# Altium PCB AMC_SFP.PcbDoc
Units mil, origin at the board's own origin, x right, y up, seen from the top; angles counter-clockwise.
Board outline 7110.66 x 2894.12 mil, 4 copper layers (Top Layer, GND, Supply, Bottom Layer), stack 91.824 mil thick; 49 components, 40 nets, 473 pads, 142 vias.
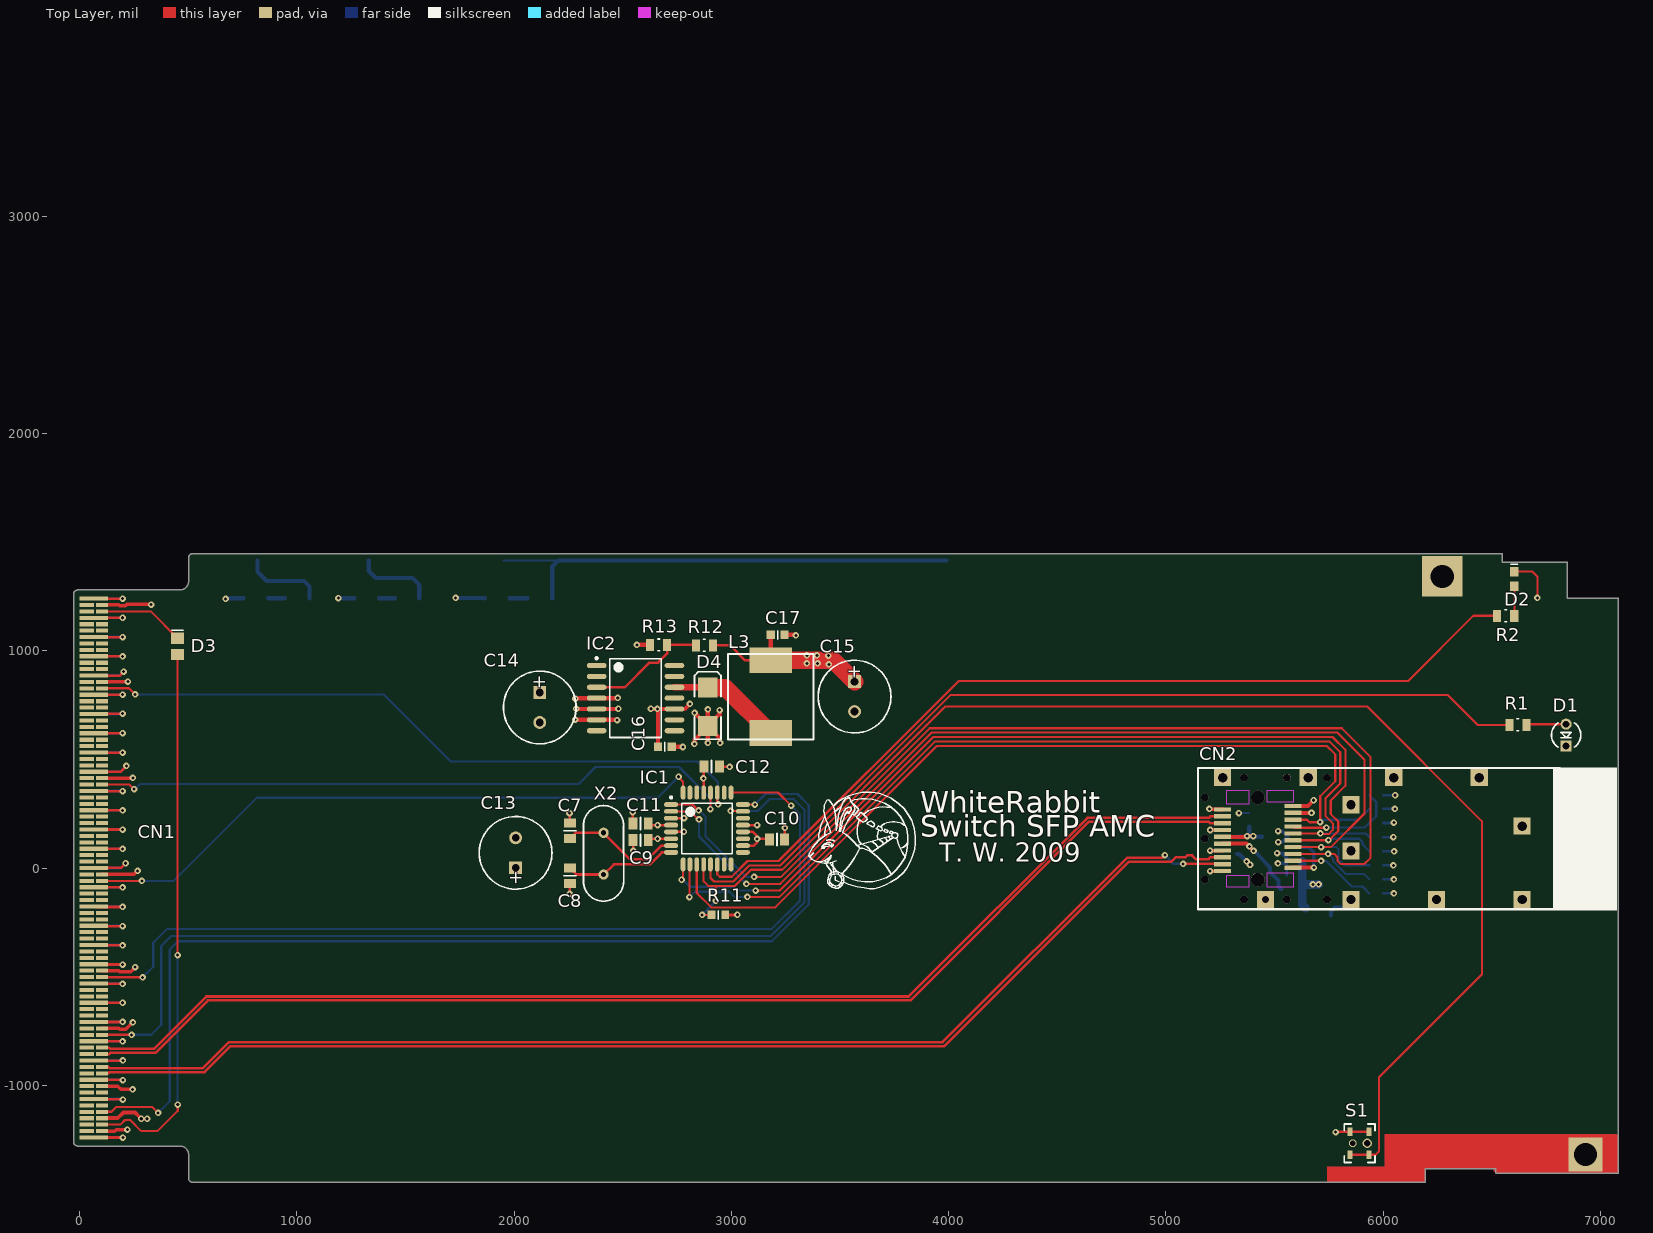
[diagram p0: Top Layer view]
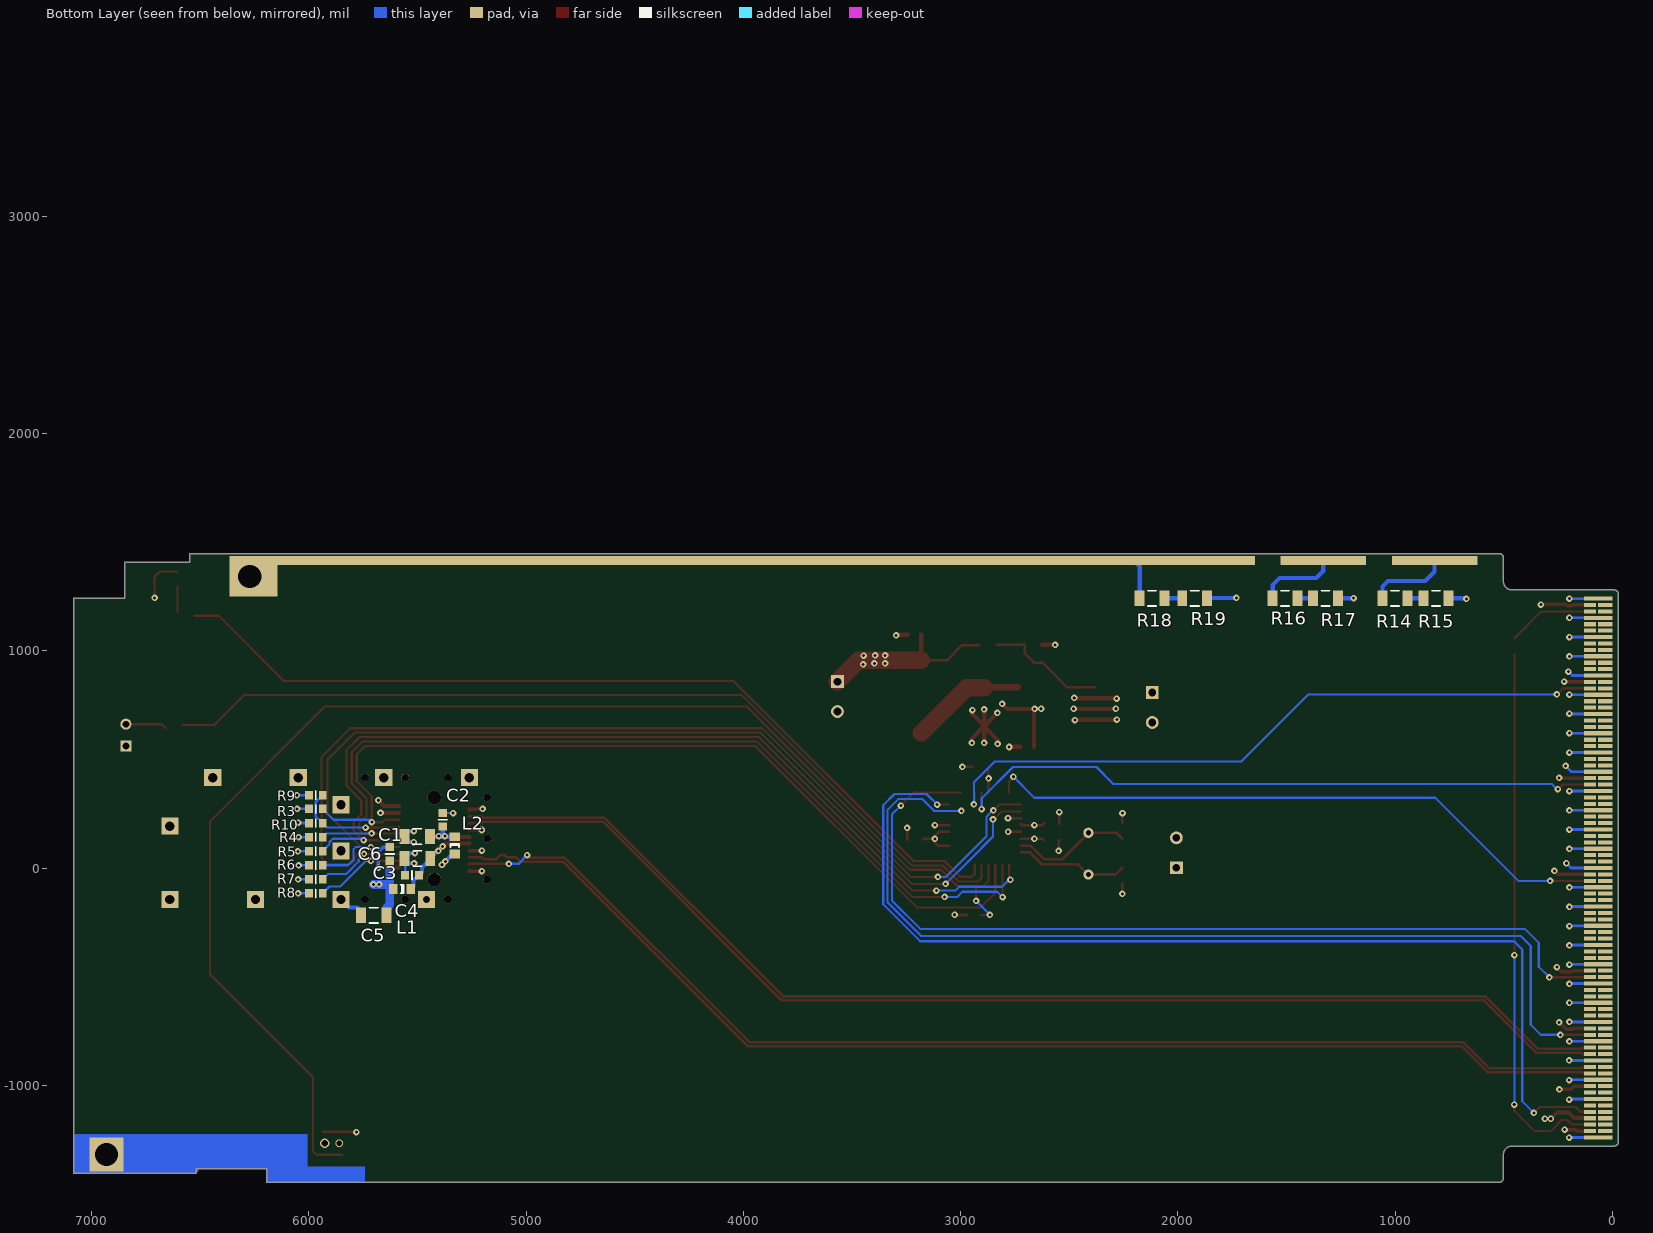
[diagram p1: Bottom Layer view, seen from below]
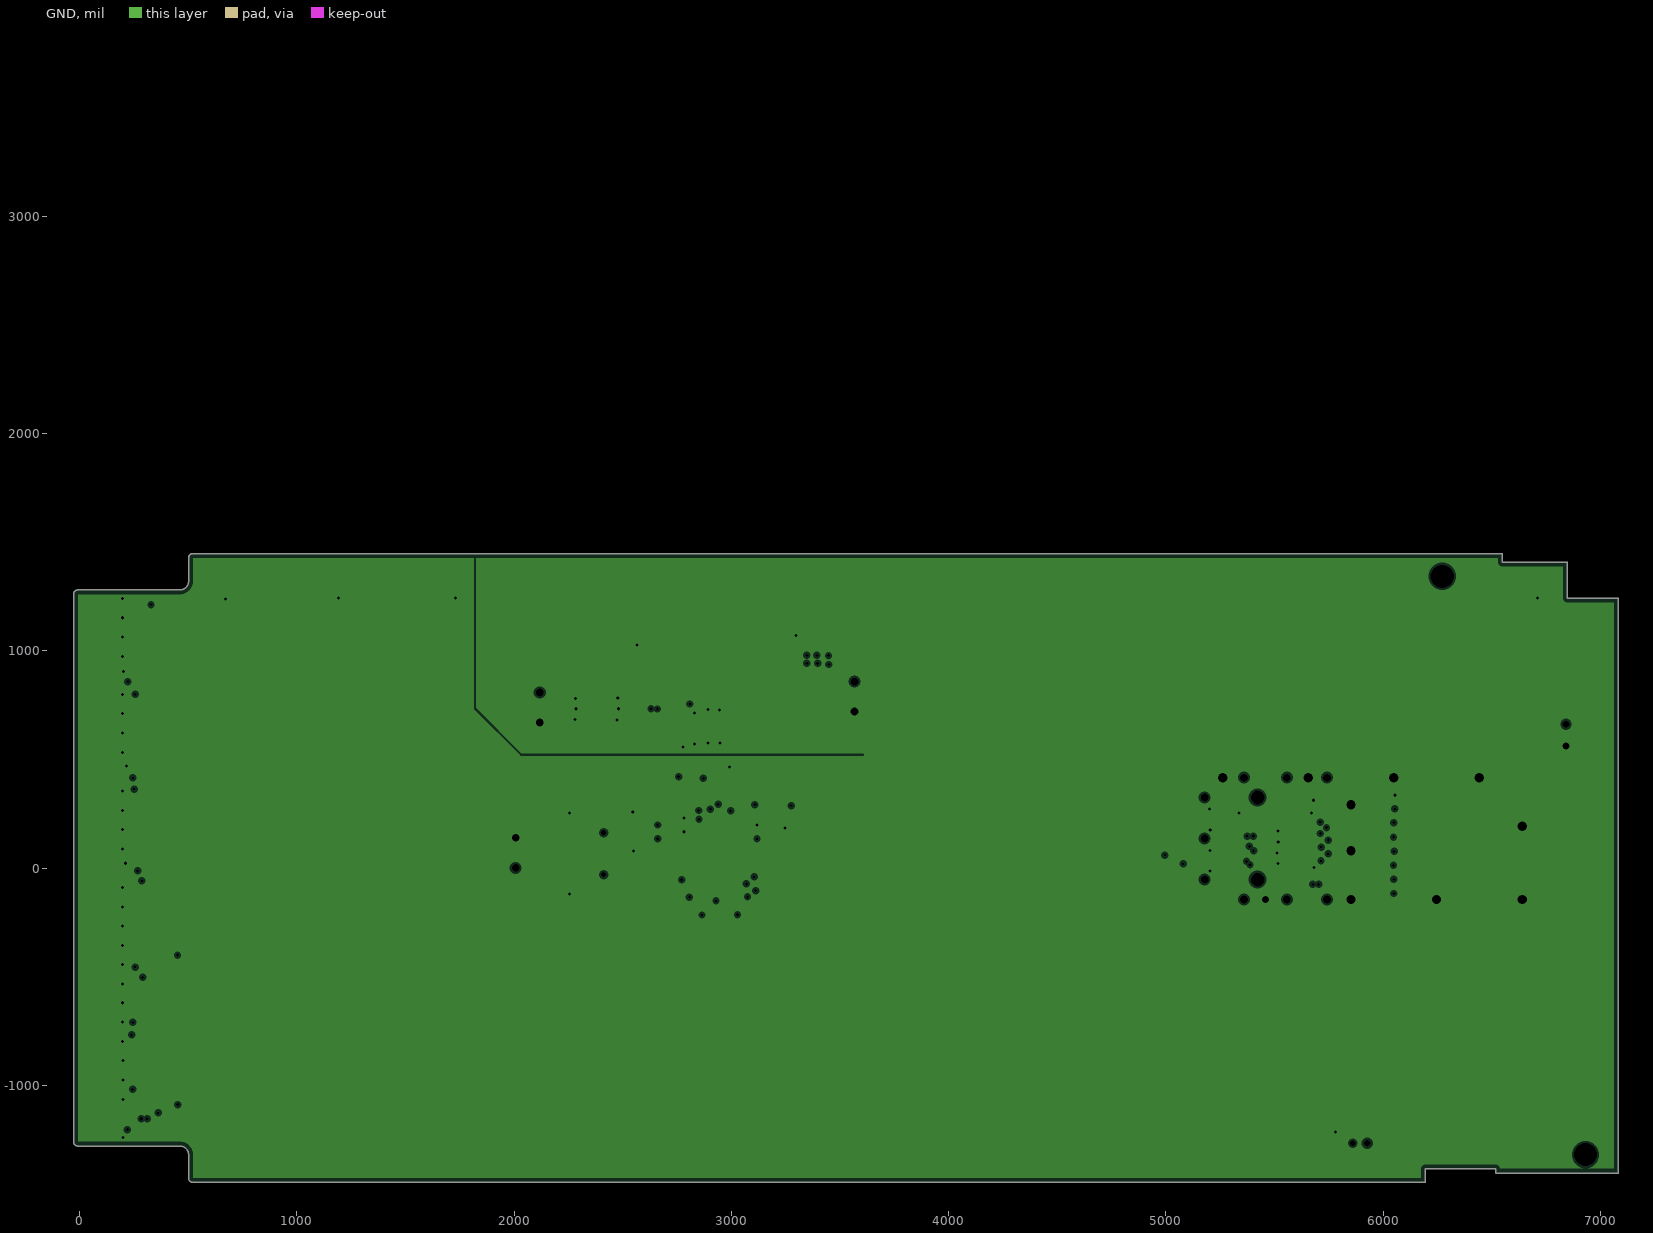
[diagram p2: GND, clearances drawn from the general rule]
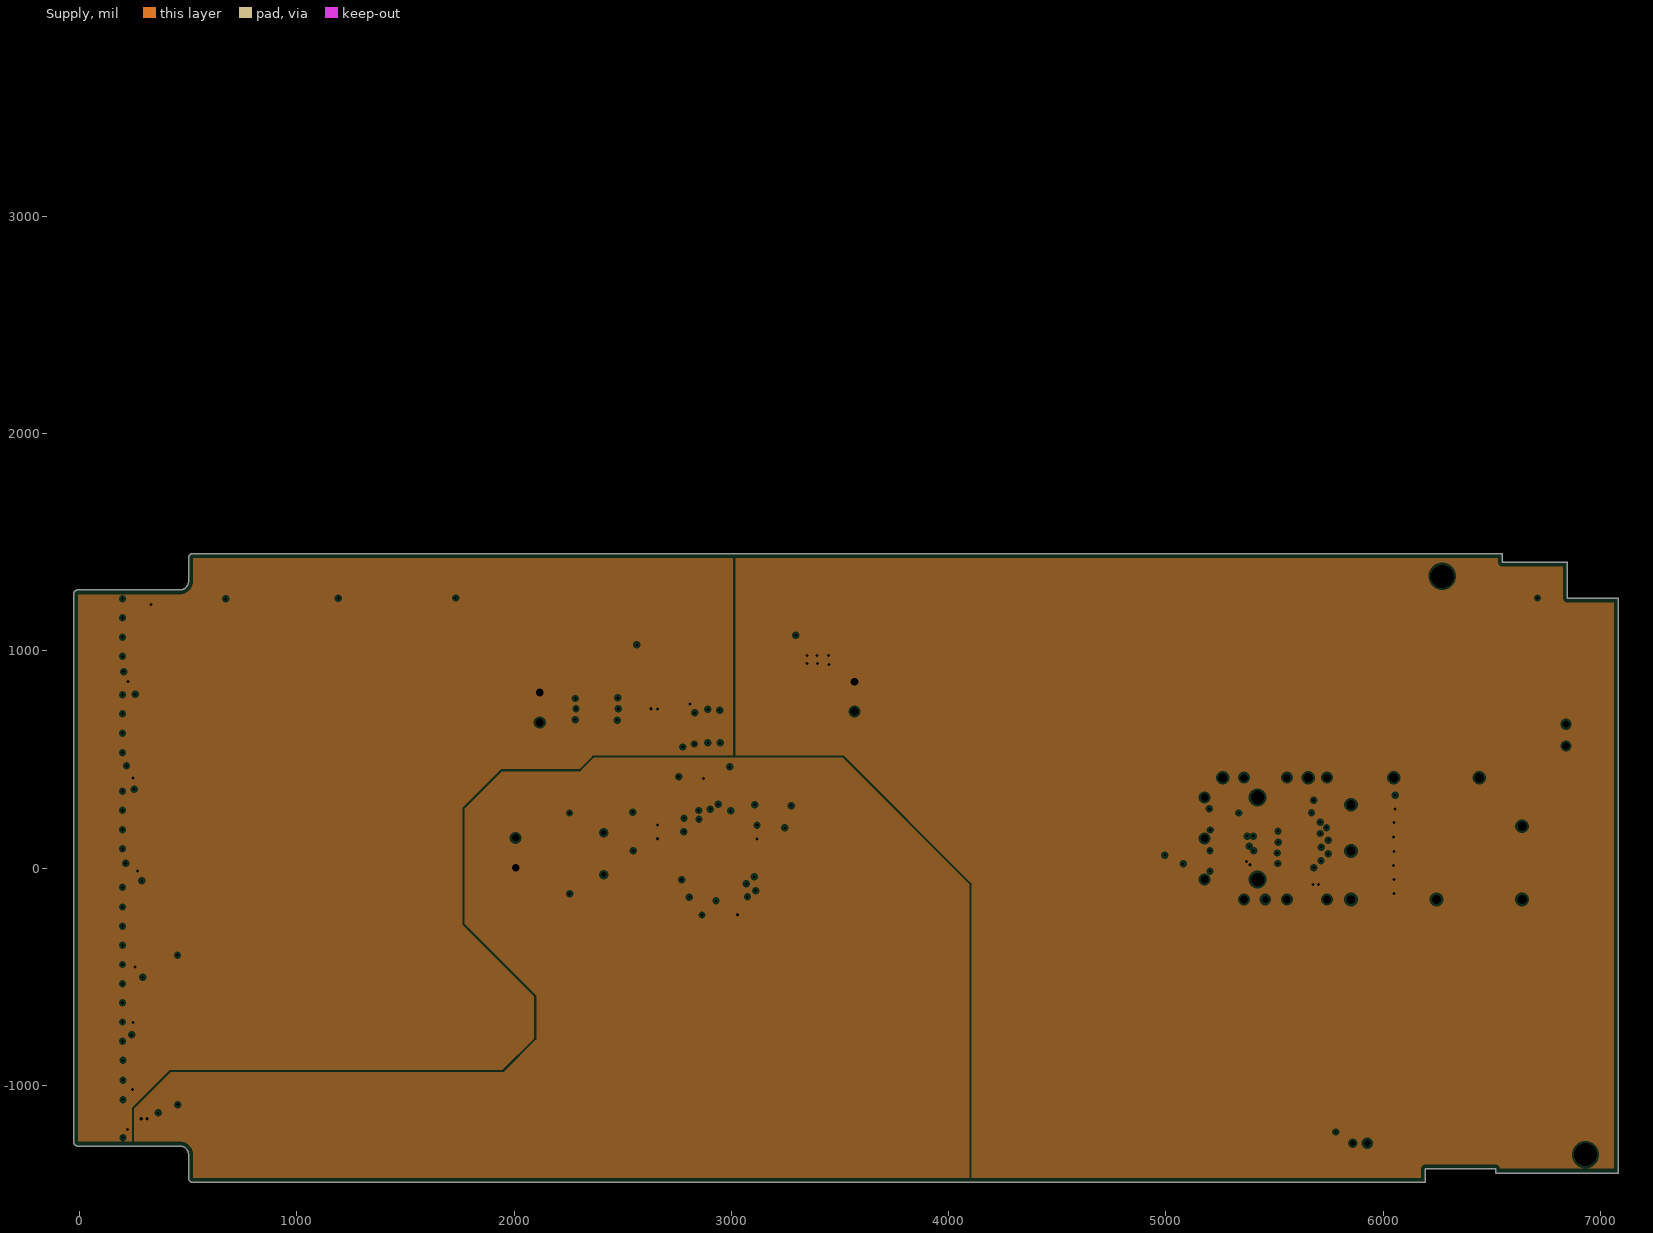
[diagram p3: Supply, clearances drawn from the general rule]
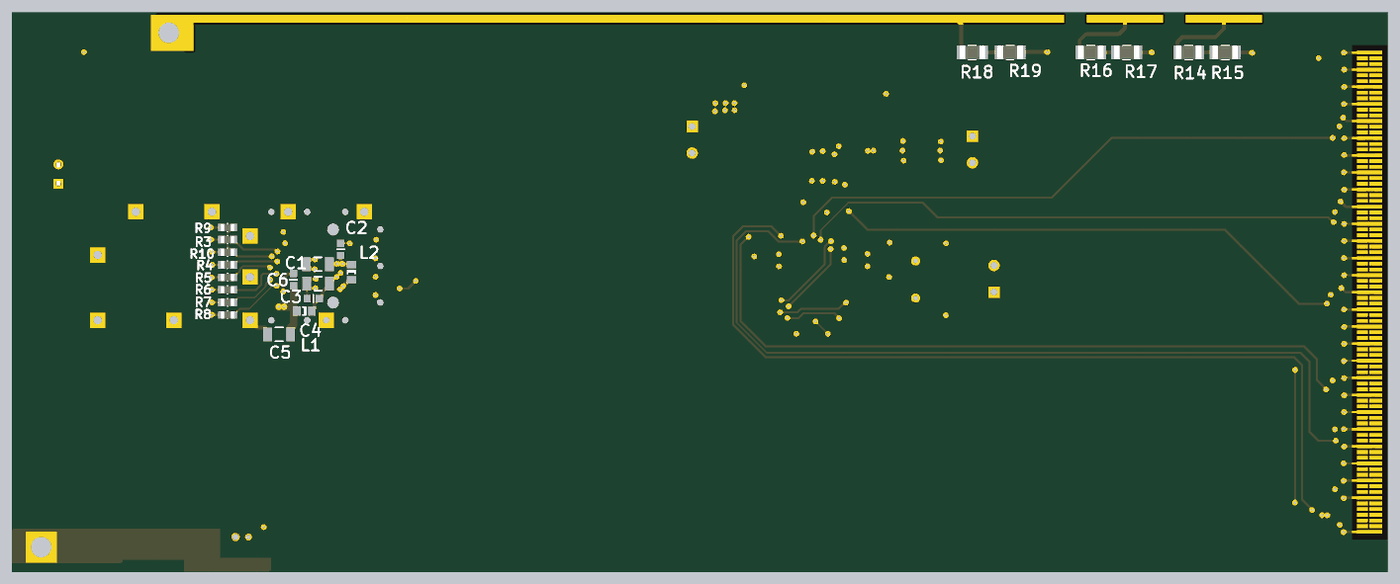
[diagram p4: 3D render of the assembled board from below, using the file's embedded part models]

## Layer stack, top to bottom
Top Layer: signal copper 1.4
Dielectric: core 61.0236, FR-4, Dk 4.8
GND: plane copper 1.4, net GND
Dielectric: prepreg 12.6, FR-4, Dk 4.8
Supply: plane copper 1.4, net (Multiple Nets)
Dielectric: core 12.6, FR-4, Dk 4.8
Bottom Layer: signal copper 1.4

## Board outline
-27.76,-1259.76 -27.76,1259.92 -27.76,1259.93 cw(c-7.86,1259.92) -7.86,1279.82 460.67,1279.82 cw(c460.73,1279.62) 460.74,1279.83 ccw(c461.71,1319.87) 461.32,1279.82 461.98,1279.82 cw(c461.98,1279.61) 462,1279.82 ccw(c461.71,1319.87) 501.77,1319.87 ccw(c461.71,1319.87) 501.77,1319.93 501.77,1427.25 cw(c521.66,1427.25) 521.66,1447.14 6547.25,1447.14 cw(c6547.25,1446.93) 6547.47,1446.93 6547.47,1407.77 6846.47,1407.77 cw(c6846.47,1407.56) 6846.68,1407.56 6846.68,1242.42 7082.69,1242.42 cw(c7082.69,1242.21) 7082.9,1242.21 7082.9,-1403.46 cw(c7082.69,-1403.46) 7082.69,-1403.68 6517.73,-1403.68 cw(c6517.73,-1403.46) 6517.52,-1403.46 6517.52,-1383.99 6193.14,-1383.99 6193.14,-1446.77 cw(c6192.92,-1446.77) 6192.92,-1446.98 519.7,-1446.98 cw(c519.7,-1446.77) 519.51,-1446.86 cw(c521.66,-1427.09) 501.88,-1429.24 cw(c501.98,-1429.05) 501.77,-1429.05 501.77,-1318.82 ccw(c462.61,-1318.82) 462.61,-1279.66 -7.86,-1279.66 -7.87,-1279.66 cw(c-7.86,-1259.76)

## Design rules (kind name [scope] priority, off if disabled: settings)
Clearance Clearance_poly_supply_1v2 [InPolygon and InNet('+1v2')] p1: gap=5
Clearance Clearance_poly_gnd_12v [(InPolygon) and (InNet(GND) or InNet('+12V_BACKPLANE') or InNet('+12V_BULK'))] p2: gap=6
Clearance Clearance_fine_bga [WithinRoom('CPU') or WithinRoom('FPGA') vs WithinRoom('CPU')    or WithinRoom('FPGA')] p3: gap=4
Clearance [All] p4: gap=6
ComponentClearance [All] p1: gap=1 collisioncheckmode=3 verticalgap=10 showdistances=TRUE
DiffPairsRouting [All] p1: maxlimit=10 minlimit=6 mostfreqgap=10 toplayer_prefgap=6 bottomlayer_prefgap=6 maxuncoupledlength=500
HoleSize [All] p1: absolutevalues=TRUE maxlimit=200 minlimit=8 maxpercent=80.000 minpercent=20.000
MinimumAnnularRing [All] p1: minimumring=5
PlaneClearance [All] p1: clearance=10
PlaneConnect [All] p1: planeconnectstyle=Direct reliefexpansion=20 reliefentries=2 reliefconductorwidth=10 reliefairgap=10
PolygonConnect PolygonConnect_bigthermals [name= 'POLY_bigthermals' vs not IsVia] p1: connectstyle=Relief reliefconductorwidth=40 reliefentries=4 polygonreliefangle="90 Angle"
PolygonConnect PolygonConnect_nothermals [name = 'POLY_nothermals'] p2: connectstyle=Direct reliefconductorwidth=10 reliefentries=4 polygonreliefangle="90 Angle"
PolygonConnect PolygonConnect_via [All vs IsVia] p3: connectstyle=Direct reliefconductorwidth=10 reliefentries=4 polygonreliefangle="90 Angle"
PolygonConnect PolygonConnect_signals [All] p4: connectstyle=Relief reliefconductorwidth=10 reliefentries=4 polygonreliefangle="90 Angle"
RoutingVias [All] p1: holewidth=8 width=20 viastyle="Through Hole" minholewidth=8 minwidth=18 maxholewidth=40 maxwidth=100
SilkscreenOverComponentPads [All] p1: minsilkscreentomaskgap=10
SolderMaskExpansion [All] p1: expansion=1.5
TestPointUsage [All] p1: valid=0 allowmultiple=FALSE
Testpoint [All] p1: side=15 testpointundercomponent=TRUE minsize=40 maxsize=100 preferedsize=60 minholesize=0 maxholesize=40 preferedholesize=32 testpointgrid=1 style=1023 order=0123456789
Width [All] p1: maxlimit=100 minlimit=5 preferedwidth=5
18 further rules are at their usual default settings.

## Classes and differential pairs
differential pair SFP_TX: +SFP_TX_P -SFP_TX_N
differential pair SFP_RX: +SFP_RX_P -SFP_RX_N

## Components (designator, comment, footprint, x,y, rotation, side; value= is the part's Value field where it differs from the comment)
C1 "10u/10V" CAPC3216X140N 5501,145 r0 bottom
C2 "100n" CAPC1608X87N 5383,222 r90 bottom
C3 "10u/10V" CAPC3216X140N 5500,44 r180 bottom
C4 "100n" CAPC1608X87N 5525,-33 r180 bottom
C5 "10u/10V" CAPC3216X140N 5701,-218 r180 bottom
C6 "100n" CAPC1608X87N 5627,65 r270 bottom
C7 "22p" CAPC2012X135N 2257,171 r270 top
C8 "22p" CAPC2012X135N 2257,-35 r90 top
C9 "100n" CAPC2012X135N 2582,128 r0 top
C10 "100n" CAPC2012X135N 3210,131 r180 top
C11 "100n" CAPC2012X135N 2582,205 r0 top
C12 "100n" CAPC2012X135N 2909,467 r180 top
C13 "220u" CAPPR350-850X600 2007,70 r90 top
C14 "220u" CAPPR350-850X600 2118,739 r270 top
C15 "220u" CAPPR350-850X600 3567,789 r270 top
C16 "100n" CAPC1608X87N 2694,558 r180 top
C17 "100n" CAPC1608X87N 3213,1073 r180 top
CN1 "UTCA_AMC_TONGUE1" UTCA_AMC_TONGUE -27.62,0.06 r0 top locked
CN2 "SFP Module socket" SFP_SINGLE_PORT 5458,-145 r90 top locked
D1 "Green" LED_3MM_RED_1C-2A 6842,612 r90 top
D2 "LED" CD1608-0603 6604,1331 r90 top
D3 "1n4148" CD2012-0805 451,1020 r90 top
D4 "MRA4006T3G" SMB 2891,742 r90 top
IC1 "ATmega8L-8AC" 32A_N 2888,182 r0 top
IC2 "LM2574M-ADJ" M14B_N 2559,782 r0 top
L1 "Inductor" INDC2012-0805 5571,-97 r0 bottom
L2 "Inductor" INDC2012-0805 5328,104 r270 bottom
L3 "SRU1048-330" L_BOURNS_SRU1048 2984,592 r0 top
R1 "330" RESC2012X60N 6620,659 r0 top
R2 "330" RESC2012X60N 6564,1161 r0 top
R3 "10k" RESC1608X55N 5968,272 r180 bottom
R4 "10k" RESC1608X55N 5968,142.33 r180 bottom
R5 "10k" RESC1608X55N 5968,77.5 r180 bottom
R6 "10k" RESC1608X55N 5968,12.67 r180 bottom
R7 "10k" RESC1608X55N 5968,-52.17 r180 bottom
R8 "10k" RESC1608X55N 5968,-117 r180 bottom
R9 "0*" RESC1608X55N 5968,335 r180 bottom
R10 "0*" RESC1608X55N 5968,207 r180 bottom
R11 "10k" RESC1608X55N 2940,-216 r0 top
R12 "16.9k" RESC2012X60N 2876,1025 r0 top
R13 "10k" RESC2012X60N 2665,1027 r0 top
R14 "100k" RESC3216X65N 1001,1241 r180 bottom
R15 "100k" RESC3216X65N 812,1241 r180 bottom
R16 "100k" RESC3216X65N 1507,1241 r180 bottom
R17 "100k" RESC3216X65N 1321,1241 r180 bottom
R18 "100k" RESC3216X65N 2119,1241 r180 bottom
R19 "100k" RESC3216X65N 1923,1241 r180 bottom
S1 "uTCA_HS" uTCA_HOTSWAP_SWITCH 5836,-1194 r0 top
X2 "8MHz" HC-49US 2412,-30 r90 top

## Footprints (in the part's own frame and the unit in brackets; to place one, negate y for a bottom-side part, rotate by r counter-clockwise, add the part's x,y. Pads: shape width x height; smd on the part's side, far side on the other; paste and mask are expansions set on the pad)
32A_N [mm] "Thin QFP, 32-Leads, Body 7x7mm, Pitch 0.8mm, IPC Medium Density"
  oval 1.65x0.55 smd: 1(-4.2,2.8) 2(-4.2,2) 3(-4.2,1.2) 4(-4.2,0.4) 5(-4.2,-0.4) 6(-4.2,-1.2) 7(-4.2,-2) 8(-4.2,-2.8) 17(4.2,-2.8) 18(4.2,-2) 19(4.2,-1.2) 20(4.2,-0.4) 21(4.2,0.4) 22(4.2,1.2) 23(4.2,2) 24(4.2,2.8)
  oval 0.55x1.65 smd: 9(-2.8,-4.2) 10(-2,-4.2) 11(-1.2,-4.2) 12(-0.4,-4.2) 13(0.4,-4.2) 14(1.2,-4.2) 15(2,-4.2) 16(2.8,-4.2) 25(2.8,4.2) 26(2,4.2) 27(1.2,4.2) 28(0.4,4.2) 29(-0.4,4.2) 30(-1.2,4.2) 31(-2,4.2) 32(-2.8,4.2)
  silkscreen extent -4.32,-2.95 2.95,3.75, body extent -3.5,-3.5 3.5,3.5, height 1.2
CAPC1608X87N [mm] "Chip Capacitor, Body 1.6x0.8mm IPC Medium Density"
  rect 0.95x1 smd: 1(-0.8,0) 2(0.8,0)
  silkscreen extent 0,-0.5 0,0.5, body extent -0.87,-0.48 0.87,0.48, height 0.87
CAPC2012X135N [mm] "Chip Capacitor, Body 2.0x1.25mm, IPC Medium Density"
  rect 1.05x1.4 smd: 1(-0.9,0) 2(0.9,0)
  silkscreen extent 0,-0.7 0,0.7, body extent -1.05,-0.67 1.05,0.67, height 1.35
CAPC3216X140N [mm] "Chip Capacitor, Body 3.2x1.6mm, IPC Medium Density"
  rect 1.15x1.8 smd: 1(-1.5,0) 2(1.5,0)
  silkscreen extent -0.5,-0.9 0.5,0.9, body extent -1.7,-0.9 1.7,0.9, height 1.4
CAPPR350-850X600 [mm] "Capacitor, Radial, Pin spacing 3.5mm - Body Diameter 8.5mm X Body Height 6.0mm"
  rect 1.5x1.5 hole 0.9: 1(-1.75,0)
  round 1.5 hole 0.9: 2(1.75,0)
  silkscreen extent -4.25,-4.25 4.25,4.25, body extent -4.26,-4.26 4.26,4.26, height 6.01
CD1608-0603 [mm] "Chip Diode; Body 1.6 x 0.8 mm (LxW typ)"
  rect 1.1x1 smd: 1(-0.85,0) 2(0.85,0)
  silkscreen extent 1.7,-0.4 1.7,0.4
CD2012-0805 [mm] "Chip Diode; Body 2.0 x 1.3 mm (LxW typ)"
  rect 1.3x1.5 smd: 1(-0.95,0) 2(0.95,0)
  silkscreen extent 1.9,-0.65 1.9,0.65
HC-49US [mm]
  round 1.2 hole 0.6: 1(0,0) 2(4.88,0)
  silkscreen extent -3.11,-2.34 8.07,2.36
INDC2012-0805 [mm] "Chip Inductor; Body 2 x 1.2 mm (LxW typ)"
  rect 1x1.2 smd: 1(-1,0) 2(1,0)
  silkscreen extent -0.2,-0.5 0.2,0.5
L_BOURNS_SRU1048 [mm]
  rect 5x3 smd: 1(5,0.75) 2(5,9.25)
  silkscreen extent 0,0 10,10
LED_3MM_RED_1C-2A [mm] "LED, Red, Body Dia. 3.43 mm, Pin spacing 2.54mm"
  rect 1.3x1.3 hole 0.8: 1(-1.27,0)
  round 1.3 hole 0.8: 2(1.27,0)
  silkscreen extent -1.44,-1.71 1.44,1.71, body extent -1.71,-1.71 1.72,1.72, height 9.85
M14B_N [mm] "SOIC, 14-Leads, Body 9x7.5mm, Pitch 1.27mm, IPC Medium Density"
  oval 2.3x0.6 smd: 1(-4.55,3.81) 2(-4.55,2.54) 3(-4.55,1.27) 4(-4.55,0) 5(-4.55,-1.27) 6(-4.55,-2.54) 7(-4.55,-3.81) 8(4.55,-3.81) 9(4.55,-2.54) 10(4.55,-1.27) 11(4.55,0) 12(4.55,1.27) 13(4.55,2.54) 14(4.55,3.81)
  silkscreen extent -4.67,-4.6 3,4.78, body extent -3.75,-4.6 3.75,4.6, height 2.65
RESC1608X55N [mm] "Chip Resistor, EIA 0603, Metric 1608, Body 1.6x0.8mm, IPC Medium Density"
  rect 0.9x1 smd: 1(-0.8,0) 2(0.8,0)
  silkscreen extent 0,-0.5 0,0.5, body extent -0.87,-0.47 0.88,0.48, height 0.55
RESC2012X60N [mm] "Chip Resistor, EIA 0805, Metric 2012, Body 2.0x1.2mm, IPC Medium Density"
  rect 0.95x1.4 smd: 1(-1,0) 2(1,0)
  silkscreen extent -0.1,-0.7 0.1,0.7, body extent -1.1,-0.67 1.1,0.68, height 0.6
RESC3216X65N [mm] "Chip Resistor, EIA 1206, Metric 3216, Body 3.2x1.6mm, IPC Medium Density"
  rect 1.15x1.8 smd: 1(-1.45,0) 2(1.45,0)
  silkscreen extent -0.5,-0.9 0.5,0.9, body extent -1.67,-0.87 1.68,0.88, height 0.65
SFP_SINGLE_PORT [mm]
  rect 0.5x2 smd: 1(3.73,-3.2) 2(4.53,-3.2) 3(5.33,-3.2) 4(6.13,-3.2) 5(6.93,-3.2) 6(7.73,-3.2) 7(8.53,-3.2) 8(9.33,-3.2) 9(10.13,-3.2) 10(10.93,-3.2) 11(10.53,5) 12(9.73,5) 13(8.93,5) 14(8.13,5) 15(7.33,5) 16(6.53,5) 17(5.73,5) 18(4.93,5) 19(4.13,5) 20(3.33,5)
  rect 2x2 hole 0.85 unplated: 21(0,0)
  rect 2x2 hole 1.1 unplated: 22(14.25,5) 23(14.25,-5) 24(0,-10) 25(5.68,-10) 26(11.08,-10) 27(14.25,-15) 28(0,-20) 29(14.25,-25) 30(0,-30) 31(8.58,-30)
  round 0.9 hole 0.9 unplated: ""(0,2.5) ""(0,-2.5) ""(0,-7.2) ""(2.33,7.1) ""(7.13,7.1) ""(11.93,7.1) ""(14.25,-7.2) ""(14.25,-2.5) ""(14.25,2.5)
  round 1.6 hole 1.6 unplated: ""(2.33,0.9) ""(11.93,0.9)
  Top Layer pour cut-out: 1.016,6.858 3.556,6.858 3.556,7.874 5.461,7.874 5.461,6.858 8.382,6.858 8.382,7.874 10.287,7.874 10.287,6.858 13.208,6.858 13.208,-7.747 1.016,-7.747
  Top Layer keep-out region: 1.521,1.905 2.791,1.905 2.791,4.572 1.521,4.572
  Top Layer keep-out region: 1.521,-3.302 3.045,-3.302 3.045,-0.127 1.521,-0.127
  Top Layer keep-out region: 11.427,-3.302 12.697,-3.302 12.697,-0.127 11.427,-0.127
  Top Layer keep-out region: 11.173,1.905 12.697,1.905 12.697,4.572 11.173,4.572
  silkscreen extent -1.14,-34.42 15.37,7.87
SMB [mm] "DO-214-AA/SMB; 2 C-Bend Leads; Body 5.3 x 3.6 mm, inc. leads (LxW)"
  rect 2.3x2.3 smd: 1(-2.25,0) 2(2.25,0)
  silkscreen extent -3.8,-1.55 4.1,1.55
UTCA_AMC_TONGUE [mm] "uTCA AMC1.0 AMC tongue connector"
  rect 3.3x0.48 smd paste-1000: 1(2.35,-31.5) 7(2.35,-27) 10(2.35,-24.75) 13(2.35,-22.5) 16(2.35,-20.25) 19(2.35,-18) 22(2.35,-15.75) 25(2.35,-13.5) 28(2.35,-11.25) 31(2.35,-9) 34(2.35,-6.75) 37(2.35,-4.5) 40(2.35,-2.25) 43(2.35,0) 46(2.35,2.25) 49(2.35,4.5) 52(2.35,6.75) 55(2.35,9) 58(2.35,11.25) 61(2.35,13.5) 64(2.35,15.75) 67(2.35,18) 70(2.35,20.25) 73(2.35,22.5) 76(2.35,24.75) 79(2.35,27) 82(2.35,29.25) 85(2.35,31.5)
  rect 1.4x0.48 smd paste-1000: 2(3.3,-30.75) 3(3.3,-30) 4(3.3,-29.25) 5(3.3,-28.5) 6(3.3,-27.75) 8(3.3,-26.25) 9(3.3,-25.5) 11(3.3,-24) 12(3.3,-23.25) 14(3.3,-21.75) 15(3.3,-21) 17(3.3,-19.5) 18(3.3,-18.75) 20(3.3,-17.25) 21(3.3,-16.5) 23(3.3,-15) 24(3.3,-14.25) 26(3.3,-12.75) 27(3.3,-12) 29(3.3,-10.5) 30(3.3,-9.75) 32(3.3,-8.25) 33(3.3,-7.5) 35(3.3,-6) 36(3.3,-5.25) 38(3.3,-3.75) 39(3.3,-3) 41(3.3,-1.5) 42(3.3,-0.75) 44(3.3,0.75) 45(3.3,1.5) 47(3.3,3) 48(3.3,3.75) 50(3.3,5.25) 51(3.3,6) 53(3.3,7.5) 54(3.3,8.25) 56(3.3,9.75) 57(3.3,10.5) 59(3.3,12) 60(3.3,12.75) 62(3.3,14.25) 63(3.3,15) 65(3.3,16.5) 66(3.3,17.25) 68(3.3,18.75) 69(3.3,19.5) 71(3.3,21) 72(3.3,21.75) 74(3.3,23.25) 75(3.3,24) 77(3.3,25.5) 78(3.3,26.25) 80(3.3,27.75) 81(3.3,28.5) 83(3.3,30) 84(3.3,30.75)
  rect 1.7x0.48 smd paste-1000: 3mate(1.55,-30.75) 3mate(1.55,-30) 3mate(1.55,-29.25) 3mate(1.55,-28.5) 3mate(1.55,-27.75) 3mate(1.55,-26.25) 3mate(1.55,-25.5) 3mate(1.55,-24) 3mate(1.55,-23.25) 3mate(1.55,-21.75) 3mate(1.55,-21) 3mate(1.55,-19.5) 3mate(1.55,-18.75) 3mate(1.55,-17.25) 3mate(1.55,-16.5) 3mate(1.55,-15) 3mate(1.55,-14.25) 3mate(1.55,-12.75) 3mate(1.55,-12) 3mate(1.55,-10.5) 3mate(1.55,-9.75) 3mate(1.55,-8.25) 3mate(1.55,-7.5) 3mate(1.55,-6) 3mate(1.55,-5.25) 3mate(1.55,-3.75) 3mate(1.55,-3) 3mate(1.55,-1.5) 3mate(1.55,-0.75) 3mate(1.55,0.75) 3mate(1.55,1.5) 3mate(1.55,3) 3mate(1.55,3.75) 3mate(1.55,5.25) 3mate(1.55,6) 3mate(1.55,7.5) 3mate(1.55,8.25) 3mate(1.55,9.75) 3mate(1.55,10.5) 3mate(1.55,12) 3mate(1.55,12.75) 3mate(1.55,14.25) 3mate(1.55,15) 3mate(1.55,16.5) 3mate(1.55,17.25) 3mate(1.55,18.75) 3mate(1.55,19.5) 3mate(1.55,21) 3mate(1.55,21.75) 3mate(1.55,23.25) 3mate(1.55,24) 3mate(1.55,25.5) 3mate(1.55,26.25) 3mate(1.55,27.75) 3mate(1.55,28.5) 3mate(1.55,30) 3mate(1.55,30.75)
  rect 1.7x0.48 smd far side paste-1000: 3mate(1.55,-30.75) 3mate(1.55,-30) 3mate(1.55,-29.25) 3mate(1.55,-28.5) 3mate(1.55,-27.75) 3mate(1.55,-26.25) 3mate(1.55,-25.5) 3mate(1.55,-24) 3mate(1.55,-23.25) 3mate(1.55,-21.75) 3mate(1.55,-21) 3mate(1.55,-19.5) 3mate(1.55,-18.75) 3mate(1.55,-17.25) 3mate(1.55,-16.5) 3mate(1.55,-15) 3mate(1.55,-14.25) 3mate(1.55,-12.75) 3mate(1.55,-12) 3mate(1.55,-10.5) 3mate(1.55,-9.75) 3mate(1.55,-8.25) 3mate(1.55,-7.5) 3mate(1.55,-6) 3mate(1.55,-5.25) 3mate(1.55,-3.75) 3mate(1.55,-3) 3mate(1.55,-1.5) 3mate(1.55,-0.75) 3mate(1.55,0.75) 3mate(1.55,1.5) 3mate(1.55,3) 3mate(1.55,3.75) 3mate(1.55,5.25) 3mate(1.55,6) 3mate(1.55,7.5) 3mate(1.55,8.25) 3mate(1.55,9.75) 3mate(1.55,10.5) 3mate(1.55,12) 3mate(1.55,12.75) 3mate(1.55,14.25) 3mate(1.55,15) 3mate(1.55,16.5) 3mate(1.55,17.25) 3mate(1.55,18.75) 3mate(1.55,19.5) 3mate(1.55,21) 3mate(1.55,21.75) 3mate(1.55,23.25) 3mate(1.55,24) 3mate(1.55,25.5) 3mate(1.55,26.25) 3mate(1.55,27.75) 3mate(1.55,28.5) 3mate(1.55,30) 3mate(1.55,30.75)
  rect 3.3x0.48 smd far side paste-1000: 86(2.35,31.5) 89(2.35,29.25) 92(2.35,27) 95(2.35,24.75) 98(2.35,22.5) 101(2.35,20.25) 104(2.35,18) 107(2.35,15.75) 110(2.35,13.5) 113(2.35,11.25) 116(2.35,9) 119(2.35,6.75) 122(2.35,4.5) 125(2.35,2.25) 128(2.35,0) 131(2.35,-2.25) 134(2.35,-4.5) 137(2.35,-6.75) 140(2.35,-9) 143(2.35,-11.25) 146(2.35,-13.5) 149(2.35,-15.75) 152(2.35,-18) 155(2.35,-20.25) 158(2.35,-22.5) 161(2.35,-24.75) 164(2.35,-27) 170(2.35,-31.5)
  rect 1.4x0.48 smd far side paste-1000: 87(3.3,30.75) 88(3.3,30) 90(3.3,28.5) 91(3.3,27.75) 93(3.3,26.25) 94(3.3,25.5) 96(3.3,24) 97(3.3,23.25) 99(3.3,21.75) 100(3.3,21) 102(3.3,19.5) 103(3.3,18.75) 105(3.3,17.25) 106(3.3,16.5) 108(3.3,15) 109(3.3,14.25) 111(3.3,12.75) 112(3.3,12) 114(3.3,10.5) 115(3.3,9.75) 117(3.3,8.25) 118(3.3,7.5) 120(3.3,6) 121(3.3,5.25) 123(3.3,3.75) 124(3.3,3) 126(3.3,1.5) 127(3.3,0.75) 129(3.3,-0.75) 130(3.3,-1.5) 132(3.3,-3) 133(3.3,-3.75) 135(3.3,-5.25) 136(3.3,-6) 138(3.3,-7.5) 139(3.3,-8.25) 141(3.3,-9.75) 142(3.3,-10.5) 144(3.3,-12) 145(3.3,-12.75) 147(3.3,-14.25) 148(3.3,-15) 150(3.3,-16.5) 151(3.3,-17.25) 153(3.3,-18.75) 154(3.3,-19.5) 156(3.3,-21) 157(3.3,-21.75) 159(3.3,-23.25) 160(3.3,-24) 162(3.3,-25.5) 163(3.3,-26.25) 165(3.3,-27.75) 166(3.3,-28.5) 167(3.3,-29.25) 168(3.3,-30) 169(3.3,-30.75)
  rect 1.4x0.48 on Bottom Solder paste-1000: 138(3.3,-7.5)
uTCA_HOTSWAP_SWITCH [mm]
  rect 0.6x1 smd: A(0.3,-0.5) B(0.3,-3.2) C(2.5,-0.5) D(2.5,-3.2)
  round 0.9 hole 0.6 unplated: ""(0.6,-1.85)
  round 1.1 hole 0.8 unplated: ""(2.3,-1.85)
  silkscreen extent -0.4,-4.1 3.2,0.4

## Part data
C1 C3 C5: library part CC1206_10UF_10V_10%_X7R, "Non-polarised capacitor"
C2 C4 C6 C16 C17: library part CC0603_100NF_50V_10%_X7R, "Non-polarised capacitor"
C7 C8: library part CC0805_22PF_50V_5%_NP0, "Non-polarised capacitor"
C9 C10 C11 C12: library part CC0805_100NF_50V_10%_X7R, "Non-polarised capacitor"
C13 C14 C15: library part CAER_100UF_10V_20%_350-850X600_LESR0R032, "Polarised capacitor"
CN1: "AMC1.0 connector"
CN2: library part SFP_SOCKET_SINGLE, "Socket for SFP module"
D1: library part LED_AVAGO_HLMP-1700, "LED Red 1C 2A"
D2: library part LED0, "Chip LED (any color)"
D3 D4: library part "D Schottky", "Schottky Diode"
IC1: "8-Bit AVR Microcontroller with 8K Bytes of In-System Programmable Flash Memory"
IC2: "SIMPLE SWITCHER 0.5A Step-Down Voltage Regulator"
L1 L2: "Ferrite bead"
L3: library part Inductor, "Inductor"
R1 R2: library part R0805_330R_1%_0.125W_100PPM, "Resistor - 1%"
R3 R4 R5 R6 R7 R8 R11: library part R0603_10K_1%_0.1W_100PPM, "Resistor - 1%"
R9 R10: library part R0603_0R_JUMPER, "Resistor - 1%"
R12: library part R0805_16K9_0.1%_0.1W_10PPM, "Resistor - 0.1%"
R13: library part R0805_10K_1%_0.125W_100PPM, "Resistor - 1%"
R14 R15 R16 R17 R18 R19: library part R1206_100K_1%_0.25W_100PPM, "Resistor - 1%"
S1: library part uTCA_HOTSWAP_SWITCH, "Push button"
X2: library part X_CRYSTAL, "Crystal oscillator"

## Free pads (board coordinates)
  rect 393.7x39.37 smd far side paste-100000 mask+10: ESD_STRIP_SEGMENT_1(818.91,1415.43) ESD_STRIP_SEGMENT_2(1330.72,1415.43)
  rect 4685.04x39.37 smd far side paste-100000 mask+10: ESD_STRIP_SEGMENT_3(3988.2,1415.43)
  rect 39.37x185.04 smd far side paste-100000 mask+10: ESD_STRIP_SEGMENT_3(6163.4,1342.6)
  rect 185.04x185.04 hole 106.3: ESD_STRIP_SEGMENT_3(6271.66,1342.6)
  rect 157.48x157.48 hole 106.3: ""(6931.11,-1318.82)

## Via types
v1: diameter 30, hole 14, Top Layer to Bottom Layer, 142 vias

## Nets (pads, with @x,y where several pads share a name; then routed paths per layer and width w, separated by ;. In a path a pad name is that pad's centre, name@x,y a point inside that pad or via, vN(x,y) a via of type N, cw(c..) or ccw(c..) an arc to the next point about the centre after c; other vN are vias at no path point)
+3V3: C5.2 C6.2 C15.1 C17.2 L1.2 L2.2 L3.2 R3.1 R4.1 R5.1 R6.1 R7.1 R8.1 R10.1 R12.2 | length 1711.7
  Top Layer w12: R12.2 2995,1025 3063.83,956.17 L3.2 ; L3.2@3181.5,956.83 C17.2
  Top Layer w20: L3.2@3181.5,956.83 C17.2 ; v1(5371,31) v1(5387,15)
  Top Layer w80: L3.2 3468.72,956.17 C15.1
  Bottom Layer w12: R8.1 v1(6049,-117) ; R7.1 v1(6048.83,-52.17) ; R6.1 v1(6047.33,12.67) ; R5.1 v1@6037.5,77.5 ; R4.1 v1(6047.33,142.33) ; R10.1 6047,207 v1(6049,209) ; R3.1 v1(6054,272)
  Bottom Layer w20: L2.2 5337.37,64.63 v1(5371,31)
  Bottom Layer w40: C6.2@5627,31.5 L1.2@5627,-82 ; C5.2@5643,-184.94 5627,-168.94 L1.2@5627,-82 ; v1@5674,-76 5633,-76 ; v1@5702,-76 5633,-76 ; L1.2@5627,-82 5633,-76
  other v1: 5676,-75 5703,-75 6050,77 3448.8,936.8 3347.8,941.8 3396.8,941.8 3446.8,977.8 3347.8,978.8 3393.8,978.8
+3V3_MP: C9.2 C10.2 C11.2 C12.2 C13.1 CN1.4 IC1.4 IC1.6 IC1.18 IC1.20 IC1.29 R11.2 | length 855.3
  Top Layer w12: C9.2 2624.19,134.76 IC1.6 ; C11.2 2624.68,197.75 v1@2661,197.75 ; v1@2652.68,197.75 v1@2661,197.75 ; IC1.4@2717.98,202.42 IC1.4 v1@2661,197.75 ; IC1.29 C12.2@2872.25,452.69 ; R11.2 3027,-216 v1(3028,-215) ; IC1.18 3103.26,103.26 3118,118 3118,147 3098.75,166.25 IC1.20 ; v1(3118,134) 3171.57,134 C10.2
  Top Layer w18: CN1.4 102.53,-1151.29 176,-1151.29 202.29,-1125 255,-1125 277,-1147 v1(284,-1154) v1(311,-1154)
  other v1: 2660.8,134.8 2660.8,197.8 2870.8,412.8
+12V: C14.1 C16.2 CN1.2 CN1.9 CN1.18 CN1.27 CN1.42 CN1.57 CN1.72 CN1.84 IC2.10 | length 1624.9
  Top Layer w16: CN1.2 162.43,-1210.57 168.95,-1204.05 215.95,-1204.05 v1@219,-1201 ; CN1.9 175.88,-1003.88 191,-1019 v1(244,-1019) ; CN1.18 180.74,-738.13 184.13,-741.53 212.47,-741.53 244,-710 v1(245,-710) ; CN1.27 179.32,-472.39 184.13,-477.2 234.8,-477.2 v1(256,-456) v1@259,-456 ; CN1.42 181.41,-29.47 250.53,-29.47 v1(267,-13) ; CN1.57 180.5,413.44 238.44,413.44 v1@244,419 ; CN1.72 220.35,856.35 v1(222,858) ; CN1.84 180.25,1210.68 184.13,1206.8 211.47,1206.8 217.66,1212.99 328.01,1212.99 v1(329,1212)
  Top Layer w20: v1(2630,733) 2631,732 v1(2659,732) ; C16.2 2662.5,728.5 v1(2659,732) ; v1(2809,755) 2786,732 IC2.10 v1(2659,732)
  other v1: 220,-1204 245,415
ESD_STRIP_SEGMENT_1: pad.ESD_STRIP_SEGMENT_1 R14.1 | length 373.7
  Bottom Layer w20: pad.ESD_STRIP_SEGMENT_1 818.91,1364.09 862,1321 1033,1321 1058.09,1295.91 R14.1
ESD_STRIP_SEGMENT_2: pad.ESD_STRIP_SEGMENT_2 R16.1 | length 370.1
  Bottom Layer w20: pad.ESD_STRIP_SEGMENT_2 1330.72,1367.28 1363,1335 1532,1335 1564.09,1302.91 R16.1
ESD_STRIP_SEGMENT_3: pad.ESD_STRIP_SEGMENT_3 R18.1 | length 1970.2
  Bottom Layer w20: R18.1 2176.09,1387.52 2204,1415.43 pad.ESD_STRIP_SEGMENT_3@3988.2,1415.43
GND: C1.2 C2.2 C3.1 C4.1 C5.1 C6.1 C7.1 C8.1 C9.1 C10.1 C11.1 C12.1 C13.2 C14.2 C15.2 C16.1 C17.1 CN1.1 CN1.7 CN1.10 CN1.13 CN1.16 CN1.19 CN1.22 CN1.25 CN1.28 CN1.31 CN1.34 CN1.37 CN1.40 CN1.43 CN1.46 CN1.49 CN1.52 CN1.55 CN1.58 CN1.61 CN1.64 CN1.67 CN1.70 CN1.73 CN1.76 CN1.79 CN1.82 CN1.85 CN1.86 CN1.89 CN1.92 CN1.95 CN1.98 CN1.101 CN1.104 CN1.107 CN1.110 CN1.113 CN1.116 CN1.119 CN1.122 CN1.125 CN1.128 CN1.131 CN1.134 CN1.137 CN1.140 CN1.143 CN1.146 CN1.149 CN1.152 CN1.155 CN1.158 CN1.161 CN1.164 CN1.170 CN2.1 CN2.9 CN2.10 CN2.11 CN2.14 CN2.17 CN2.20 CN2.21 CN2.22 CN2.23 CN2.24 CN2.25 CN2.26 CN2.27 CN2.28 CN2.29 CN2.30 CN2.31 D1.1 D2.2 D4.1 IC1.3 IC1.5 IC1.21 IC2.4 IC2.5 IC2.6 R9.1 R13.1 R15.2 R17.2 R19.2 S1.A S1.C | length 10947.7
  Top Layer w10: v1(5781,-1215) 5782.31,-1213.69 S1.C ; D2.2 6685.54,1364.46 6710,1340 v1(6710,1243)
  Top Layer w12: CN1.46@82.34,88.64 v1@206.8,88.64 ; CN1.28@82.9,-444.2 v1@206.8,-444.2 ; CN1.31@82.9,-356.2 v1@206.8,-356.2 ; CN1.34@82.9,-267.2 v1@206.8,-267.2 ; CN1.37@82.9,-179.2 v1@206.8,-179.2 ; CN1.40@82.9,-89.2 v1@206.8,-89.2 ; CN1.43@82.9,0.8 190.8,0.8 v1(212,22) ; CN1.52@82.9,265.8 v1@206.8,265.8 ; CN1.55@82.9,353.8 v1@206.8,353.8 ; CN1.58@82.9,442.8 188.8,442.8 v1(216,470) ; CN1.61@82.9,530.8 v1@206.8,530.8 ; CN1.64@82.9,620.8 v1@206.8,620.8 ; CN1.67@82.9,710.8 v1@206.8,710.8 ; CN1.70@82.9,797.8 v1@206.8,797.8 ; CN1.73@82.9,884.8 183.8,884.8 v1(203,904) ; CN1.76@82.9,973.8 v1@206.8,973.8 ; CN1.79@82.9,1062.8 v1@206.8,1062.8 ; CN1.82@82.9,1151.8 v1@206.8,1151.8 ; CN1.85@82.9,1239.8 v1@206.8,1239.8 ; CN1.22@83.92,-619.78 v1@206.8,-619.78 ; CN1.25@83.92,-532.78 v1@206.8,-532.78 ; CN1.49@83.92,177.22 v1@206.8,177.22 ; CN1.19@85.17,-708.53 v1@206.8,-708.53 ; CN1.13@88.39,-886.69 v1@208.8,-886.69 ; CN1.16@88.59,-797.11 v1@206.8,-797.11 ; CN1.1@89.43,-1240.28 v1@208.8,-1240.28 ; CN1.10@89.43,-975.28 v1@208.8,-975.28 ; CN1.7@93.84,-1063.86 v1@208.8,-1063.86 ; v1@205.61,-444.2 v1@206.8,-443 ; v1@205.61,-356.2 v1@206.8,-355 ; v1@205.61,-267.2 v1@206.8,-266 ; v1@205.61,-179.2 v1@206.8,-178 ; v1@205.61,-89.2 v1@206.8,-88 ; v1@205.61,265.8 v1@206.8,267 ; v1@205.61,353.8 v1@206.8,355 ; v1@205.61,530.8 v1@206.8,532 ; v1@205.61,620.8 v1@206.8,622 ; v1@205.61,710.8 v1@206.8,712 ; v1@205.61,797.8 v1@206.8,799 ; v1@205.61,973.8 v1@206.8,975 ; v1@205.61,1062.8 v1@206.8,1064 ; v1@205.61,1151.8 v1@206.8,1153 ; v1@205.61,1239.8 v1@206.8,1241 ; v1@205.91,-797.11 v1@206.8,-798 ; v1@206.17,88.64 v1@206.8,88 ; v1@206.33,-708.53 v1@206.8,-709 ; v1@206.58,-619.78 v1@206.8,-620 ; v1@206.58,-532.78 v1@206.8,-533 ; v1@206.58,177.22 v1@206.8,177 ; v1@206.66,-1063.86 v1@208.8,-1066 ; v1@207.11,-886.69 v1@208.8,-885 ; v1@208.08,-1240.28 v1@208.8,-1241 ; v1@208.08,-975.28 v1@208.8,-976 ; v1(2255,253) 2257,251 C7.1 ; v1(2256,-119) 2257,-118 C8.1 ; v1(2546,257) 2546.57,256.43 C11.1 ; C9.1 2549,125.57 v1(2549,79) ; IC1.5 2780.25,166.25 v1(2781,167) ; IC1.3 2781.76,229.24 v1(2782,229.49) ; C12.1 2991,467 v1(2992,466) ; IC1.21 3117.25,197.75 v1(3118,197) ; C10.1 3245.43,184.43 v1(3246,185)
  Top Layer w16: v1@5200,269 5200.57,269.57 CN2.11 ; v1(5203,-14) 5203.1,-13.9 CN2.20 ; v1(5203,80) 5203.59,80.59 CN2.17 ; v1(5204,175) 5204.08,175.08 CN2.14
  Top Layer w18: CN2.11@5240.43,269.57 CN2.11 ; CN2.20@5254.9,-13.9 CN2.20 ; CN2.1 5680.85,1.85 v1(5681,2) ; CN2.9 5669.82,253.82 v1(5670,254) ; CN2.10 5653.31,285.32 v1(5680,312)
  Top Layer w20: v1(2281,683) 2282,682 IC2.6 2473,682 v1(2474,681) ; v1(2282,780) 2284,782 IC2.4 v1@2476,782 ; v1(2285,733) 2286,732 IC2.5 2479,732 v1(2480,733) ; v1(2565,1027) R13.1 ; C16.1 2776,558 v1(2777,557) ; v1(2830,571) 2830,589 2891,650 D4.1 ; v1@2831,713.42 D4.1 ; v1(2892,576) 2891,577 D4.1 ; v1(2892,730) 2891,730 D4.1 ; v1(2946,727) 2946,708.42 D4.1 ; v1(2948,576) 2948,596.42 D4.1 ; C17.1 3295,1073 v1(3297,1071)
  Bottom Layer w10: v1@5335,253 5335.5,253.5 C2.2
  Bottom Layer w12: CN1.170 v1@198.91,-1240.1 ; CN1.164 v1@196.74,-1062.94 ; CN1.161 v1@198.16,-974.35 ; CN1.158 v1@199.03,-885.77 ; CN1.155 v1@196.99,-797.19 ; CN1.152 v1@197.72,-708.61 ; CN1.149 v1(197.8,-620) ; CN1.146 v1@196.24,-531.44 ; CN1.143 v1@196.46,-442.86 ; CN1.140 v1@195.88,-354.28 ; CN1.137 v1@196.3,-265.69 ; CN1.134 v1@195.72,-177.11 ; CN1.131 v1@197.13,-88.53 ; CN1.128 190.05,0.05 v1(212,22) ; CN1.125 v1@197.17,88.64 ; CN1.122 v1@197.58,177.22 ; CN1.119 v1(197.8,265.8) ; CN1.116 v1@197.22,354.39 ; CN1.113 188.97,442.97 v1(216,470) ; CN1.110 v1@197.06,531.55 ; CN1.107 v1@197.13,620.13 ; CN1.104 v1@195.72,708.72 ; CN1.101 v1@197.3,797.3 ; CN1.98 184.88,885.88 v1(203,904) ; CN1.95 v1@197.14,974.46 ; CN1.92 v1@197.56,1063.05 ; CN1.89 v1@197.63,1151.63 ; CN1.86 v1@197.39,1240.21 ; C4.1 C3.1@5556.5,41.44 ; R9.1 v1(6055,335)
  Bottom Layer w16: v1(5512,69) 5534.06,69 C3.1 5559.06,34.06 5546,21 v1(5515,21) ; v1(5516,170) 5535.06,170 C1.2 5534.06,119 v1(5517,119) ; C6.1 5656.5,96.5 5681,72 v1(5681,2)
  Bottom Layer w20: v1(672,1239) 674,1241 R15.2 ; v1(1191,1242) 1192,1241 R17.2 ; v1(1731,1243) 1863.91,1243 R19.2 ; v1@2476,782 v1(2477,783) ; C5.1 5760.06,-198.94 5777,-182 5814.7,-182 CN2.24
  other v1: 199.8,-1241 199.8,-1066 199.8,-976 199.8,-885 197.8,-798 197.8,-708.53 197.8,-533 197.8,-444.2 197.8,-356.2 197.8,-267.2 197.8,-179.2 197.8,-89.2 197.8,88 197.8,177 5336,253 5200,272 197.8,353.8 197.8,530.8 197.8,620.8 197.8,710.8 2831,714 197.8,797.8 197.8,973.8 197.8,1062.8 197.8,1151.8 197.8,1239.8
LED_SFP: IC1.13 R1.1 | length 4159
  Top Layer w10: IC1.13 2903.75,-45.75 2920,-62 3008.28,-62 3082.28,12 3225.29,12 4010.29,797 6296,797 6434,659 R1.1
LED_UTCA: IC1.14 R2.1 | length 4137.2
  Top Layer w10: IC1.14 2935.24,-29.24 2946,-40 3002,-40 3074,32 3217.01,32 4046.01,861 6115,861 6415,1161 R2.1
LOS: CN2.8 IC1.11 R3.2 | length 4143.2
  Top Layer w10: IC1.11 2840.76,-114.76 2907,-181 3202,-181 3944,561 5741,561 5779,523 5779,399 5710,330 v1(5710,211) 5661,211 5649.68,222.32 CN2.8
  Bottom Layer w10: v1(5710,211) 5721,222 5886.5,222 5896.25,231.75 R3.2
MOD_DEF0: CN2.6 IC1.10 R4.2 | length 4334.1
  Top Layer w10: v1(2807,-134) 2807,14.39 IC1.10 ; v1(3074,-133) 3075,-134 3220.72,-134 3937.72,583 5752,583 5802,533 5802,389 5735,322 5735,239 5768.5,205.5 5768.5,175.5 5749,156 5714,156 v1(5711,159) 5710.67,159.33 CN2.6
  Bottom Layer w10: v1(2807,-134) 2808,-133 2832,-109 2992,-109 3016,-133 v1(3074,-133) ; v1@5716,154 v1(5711,159) 5919.84,159 R4.2 5933.85,144.99 R4.2@5924.84,154
MOD_DEF1: CN2.5 IC1.9 R5.2 | length 4335.1
  Top Layer w10: v1(2771,-54) 2777.76,-47.24 IC1.9 IC1.9@2774,12.88 ; v1(3112,-104) 3112.78,-103.22 3223.22,-103.22 3929.43,603 5767,603 5826,544 5826,378 5759,311 5759,248 5793.2,213.8 5793.2,170.8 5750.4,128 v1(5748,128) ; CN2.5 v1@5747.83,127.83
  Bottom Layer w10: v1(2771,-54) 2777,-54 2809.5,-86.5 3006.5,-86.5 3023,-103 3091,-103 3111,-103 v1(3112,-104) ; v1(5748,128) 5755,135 5889.62,135 5905,119.62 5905,109 R5.2
MOD_DEF2: CN2.4 IC1.2 R6.2 | length 4646
  Top Layer w10: IC1.2 2723.9,259.49 2812.09,259.49 2847.57,224 v1(2851,224) ; v1(3068.93,-72.93) 3068.93,-73.07 3225.07,-73.07 3921.15,623 5790,623 5914,499 5914,251 5759.34,96.34 v1(5714.66,96.34) CN2.4
  Bottom Layer w10: v1@2854,224 v1(2851,224) 2851,145 2961,35 v1(3068.93,-72.93) ; v1(5714.66,96.34) 5784.66,96.34 5795,86 5795,37 5819.33,12.67 R6.2
NetC1_1: C1.1 C2.1 CN2.15 L2.1 | length 429.9
  Top Layer w18: CN2.15 5338,143.58 v1@5373.58,143.58 ; v1@5363,143.58 5366.42,147 v1(5402,147) ; v1(5374,147) v1@5388,147
  Bottom Layer w20: L2.1 5440.31,143.37 C1.1 5391,145 5383,153 C2.1 ; L2.1@5330,142 5333,145 5373,145 5374,144 v1(5374,147)
NetC3_2: C3.2 C4.2 CN2.16 L1.1 | length 445
  Top Layer w18: CN2.16 5370.91,112.09 v1(5404,79)
  Bottom Layer w18: v1@5404.97,79.97 C3.2 C3.2@5440.94,41.06 ; L1.1@5528.11,-97 L1.1 5518.8,-84.17 5518.8,-58.29 C4.2 5490.63,-33 5479,-21.37 5479,3 ; C3.2@5440.94,41.06 5479,3 ; C3.2@5440.94,41.06 5479,3
  other v1: 5384,100
NetC7_2: C7.2 IC1.7 X2.2 | length 553.4
  Top Layer w12: C7.2 2283.56,162.13 X2.2 2534.13,40 2615,40 2678.26,103.26 IC1.7
NetC8_2: C8.2 IC1.8 X2.1 | length 520.4
  Top Layer w12: C8.2 2287.43,-30 X2.1 2459,17 2626,17 2680.76,71.76 IC1.8
NetCN1_3: CN1.3 D3.1 | length 2519.1
  Top Layer w10: CN1.3 188,-1181.05 209.05,-1160 233,-1160 284,-1211 358,-1211 452,-1117 v1(452,-1089) ; v1(451,-401) D3.1
  Bottom Layer w10: v1@451,-1090 v1(451,-401)
NetCN1_83: CN1.83 D3.2 | length 400
  Top Layer w10: CN1.83 247.24,1181.16 327.24,1181.16 D3.2
NetCN2_2: CN2.2 R8.2 | length 414.8
  Top Layer w10: CN2.2 5713.65,33.35 v1(5714,33)
  Bottom Layer w10: v1(5714,33) 5737,33 5855,-85 5904.5,-85 R8.2
NetCN2_7: CN2.7 R9.2 R10.2 | length 525
  Top Layer w10: CN2.7 5589.81,185 5742,185 v1@5745,182
  Bottom Layer w10: v1(5739,186) 5739.25,186.25 5915.75,186.25 R10.2 5968,238.5 5968,303.5 R9.2
NetD1_2: D1.2 R1.2 | length 190.7
  Top Layer w10: R1.2@6658.37,645 6675.37,662 D1.2
NetD2_1: D2.1 R2.2 | length 119.9
  Top Layer w10: R2.2@6604,1177.63 D2.1
NetD4_2: D4.2 IC2.12 L3.1 | length 529.9
  Top Layer w30: IC2.12 2889.58,832 D4.2
  Top Layer w80: D4.2 2971.8,830.58 L3.1
NetIC2_3: IC2.3 R12.1 R13.2 | length 559.3
  Top Layer w12: IC2.3 2509.37,832 2622.19,944.82 2662.81,944.82 2704.37,986.37 R13.2 R12.1@2834.63,1027
NetR14_2: R14.2 R15.1 | length 74.8
  Bottom Layer w20: R15.1 R14.2
NetR16_2: R16.2 R17.1 | length 71.8
  Bottom Layer w20: R17.1 R16.2
NetR18_2: R18.2 R19.1 | length 81.8
  Bottom Layer w20: R19.1 R18.2
SFP_RX_N: CN1.12 CN2.19 | length 5584.3
  Top Layer w12: CN1.12 132.41,-915.3 138.17,-921.06 567.48,-921.06 686.82,-801.73 3972.82,-801.73 4821.54,47 4983,47 v1(4995,59) ; v1(5079,19) 5259.75,19 CN2.19
  Bottom Layer w12: v1(4995,59) 5035,19 v1(5079,19)
SFP_RX_P: CN1.11 CN2.18 | length 5584.6
  Top Layer w12: CN1.11 132.41,-944.83 138.17,-939.06 574.94,-939.06 694.27,-819.73 3980.27,-819.73 4829,29 5025,29 5045,49 5089,49 5098,58 5120,58 5137,41 5196,41 5204,49 5261.06,49 CN2.18
SFP_TX_N: CN1.15 CN2.12 | length 5609.2
  Top Layer w12: CN1.15 136.61,-826.72 142.37,-832.48 342.06,-832.48 583.27,-591.27 3816.27,-591.27 4638.87,231.32 5198.32,231.32 5205.07,238.07 CN2.12 ; CN2.12@5259.08,236 CN2.12 ; CN2.12@5260.08,237 CN2.12 ; CN2.12 CN2.12
SFP_TX_P: CN1.14 CN2.13 | length 5604.7
  Top Layer w12: CN1.14 136.61,-856.24 142.37,-850.48 349.52,-850.48 590.73,-609.27 3823.73,-609.27 4646.32,213.32 5196.68,213.32 5203.43,206.57 CN2.13
TX_DISABLE: CN2.3 IC1.1 R7.2 | length 4858.9
  Top Layer w10: IC1.1 2820.76,292.24 2849,264 v1(2849,265) ; v1(3105,-41) 3105.93,-41.93 3227.93,-41.93 3912.86,643 5809,643 5942,510 5942,48 5912,18 5804,18 5789,33 5789,51 5775,65 v1(5747,65) 5746.84,64.84 CN2.3
  Bottom Layer w10: v1(2849,265) 2854,265 2854,263.43 2881,236.43 2881,146 3068,-41 v1(3105,-41) ; v1(5747,65) 5770,42 5770,31 5829,-28 5912.34,-28 R7.2
UTCA_ENABLE: CN1.41 IC1.32 | length 2934.4
  Top Layer w10: CN1.41 v1(287,-59) ; v1(2757,420) 2757,418 2777.76,397.24 IC1.32
  Bottom Layer w10: v1(287,-59) 433,-59 815.8,323.8 2660.8,323.8 v1(2757,420)
UTCA_GA0: CN1.5 IC1.24 | length 4888.7
  Top Layer w10: CN1.5 147.01,-1121.99 169,-1100 335,-1100 v1(362,-1127) ; IC1.24 3107.76,292.24 v1(3108,292)
  Bottom Layer w10: v1(362,-1127) 415,-1074 415,-375 453,-337 3186,-337 3356,-167 3356,240 ; v1(3108,292) 3157,341 3304,341 3356,289 3356,240 ; 3356,247 3356,240
UTCA_GA1: CN1.17 IC1.23 | length 4571.3
  Top Layer w10: CN1.17 v1(240,-767.66) ; v1(2997,263) 3051.09,263 IC1.23
  Bottom Layer w10: v1(240,-767.66) 330.34,-767.66 376,-722 376,-359 422,-313 3181.72,-313 3336,-158.72 3336,241 ; v1(2997,263) 2998,262 3120.43,262 3175.43,317 3287.43,317 3336,268.43 3336,241 ; 3336,247 3336,241
UTCA_GA2: CN1.26 IC1.25 | length 4181.4
  Top Layer w10: CN1.26 103.39,-503 v1(290,-503) ; IC1.25 3214.65,347.35 v1(3275,287)
  Bottom Layer w10: v1(290,-503) 339,-454 339,-344 403,-280 3186.43,-280 3316,-150.43 3316,247 3276,287 v1(3275,287)
UTCA_HS: IC1.12 R11.1 S1.B S1.D | length 6283.8
  Top Layer w10: v1@2868,-216 R11.1 ; IC1.12 2872.25,-61.25 2893,-82 2929,-82 ; v1(2929,-151) 2929,-82 ; S1.B S1.D 5965.02,-1319.98 5980,-1305 5980,-964 6454,-490 6454,216 5927,743 3984.58,743 3233.58,-8 3090.57,-8 3016.57,-82 2929,-82
  Bottom Layer w10: v1@2868,-216 2868,-212 v1(2929,-151)
  other v1: 2865,-216
UTCA_SCL_L: CN1.56 IC1.28 | length 3037.9
  Top Layer w10: CN1.56 102.41,383.8 230.2,383.8 v1(251,363) ; v1(2903,271) 2903.75,271.75 IC1.28
  Bottom Layer w10: v1(251,363) 255,363 279,387 784,387 2297,387 2375,465 2759,465 2903,321 v1(2903,271)
UTCA_SDA_L: CN1.71 IC1.27 | length 3177.7
  Top Layer w10: CN1.71 103.28,827.8 227.2,827.8 v1(256,799) ; IC1.27 2935.24,292.76 2937,291 v1(2939,293)
  Bottom Layer w10: v1(256,799) 1400,799 1709,490 2843,490 2939,394 v1(2939,293)
pads on no net: CN1.3mate CN1.6 CN1.8 CN1.20 CN1.21 CN1.23 CN1.24 CN1.29 CN1.30 CN1.32 CN1.33 CN1.35 CN1.36 CN1.38 CN1.39 CN1.44 CN1.45 CN1.47 CN1.48 CN1.50 CN1.51 CN1.53 CN1.54 CN1.59 CN1.60 CN1.62 CN1.63 CN1.65 CN1.66 CN1.68 CN1.69 CN1.74 CN1.75 CN1.77 CN1.78 CN1.80 CN1.81 CN1.87 CN1.88 CN1.90 CN1.91 CN1.93 CN1.94 CN1.96 CN1.97 CN1.99 CN1.100 CN1.102 CN1.103 CN1.105 CN1.106 CN1.108 CN1.109 CN1.111 CN1.112 CN1.114 CN1.115 CN1.117 CN1.118 CN1.120 CN1.121 CN1.123 CN1.124 CN1.126 CN1.127 CN1.129 CN1.130 CN1.132 CN1.133 CN1.135 CN1.136 CN1.138 CN1.139 CN1.141 CN1.142 CN1.144 CN1.145 CN1.147 CN1.148 CN1.150 CN1.151 CN1.153 CN1.154 CN1.156 CN1.157 CN1.159 CN1.160 CN1.162 CN1.163 CN1.165 CN1.166 CN1.167 CN1.168 CN1.169 CN2. IC1.15 IC1.16 IC1.17 IC1.19 IC1.22 IC1.26 IC1.30 IC1.31 IC2.1 IC2.2 IC2.7 IC2.8 IC2.9 IC2.11 IC2.13 IC2.14 S1.
copper on no net: | length 2036.9
  Bottom Layer w8: 1951.25,1415.43 3988.2,1415.43

## Polygon pours and split planes (outlines as drawn)
GND on GND (split plane): 6527.37,1407.77 6527.76,1403.85 6528.9,1400.08 6530.76,1396.61 6533.26,1393.56 6536.3,1391.06 6539.78,1389.21 6543.55,1388.06 6547.47,1387.68 6826.58,1387.68 6826.58,1242.42 6826.97,1238.5 6828.11,1234.73 6829.97,1231.25 6832.47,1228.21 6835.51,1225.71 6838.99,1223.85 6842.76,1222.71 6846.68,1222.32 7062.8,1222.32 7062.8,-1383.58 6537.57,-1383.58 6537.23,-1380.07 6536.08,-1376.3 6534.23,-1372.82 6531.73,-1369.78 6528.68,-1367.28 6525.21,-1365.42 6521.44,-1364.28 6517.52,-1363.89 6193.14,-1363.89 6189.21,-1364.28 6185.44,-1365.42 6181.97,-1367.28 6178.92,-1369.78 6176.43,-1372.82 6174.57,-1376.3 6173.42,-1380.07 6173.04,-1383.99 6173.04,-1426.89 523.66,-1426.89 522.39,-1426.36 521.86,-1425.09 521.86,-1318.82 521.86,-1318.73 521.49,-1312.18 520.37,-1305.63 518.54,-1299.25 515.99,-1293.11 512.78,-1287.29 508.93,-1281.87 504.51,-1276.92 499.55,-1272.49 494.13,-1268.65 488.32,-1265.43 482.18,-1262.89 475.79,-1261.05 469.24,-1259.94 462.69,-1259.57 462.61,-1259.56 -7.66,-1259.56 -7.66,1259.72 460.08,1259.72 460,1258.9 460.23,1258.81 460.21,1258.31 460.73,1258.09 461.34,1258.34 461.98,1258.08 461.98,1258.61 465.14,1259.92 468.45,1260.1 475.1,1261.23 481.58,1263.1 487.81,1265.68 493.71,1268.94 499.22,1272.85 504.25,1277.34 508.74,1282.37 512.64,1287.87 515.91,1293.77 518.49,1300 520.35,1306.49 521.48,1313.14 521.86,1319.82 521.86,1319.87 521.86,1319.9 521.86,1319.93 521.86,1427.05 1814.9,1427.05 1814.9,734 1815.29,732.05 1816.4,730.4 2029.4,517.4 2031.05,516.29 2033,515.9 3605,515.9 3606.95,516.29 3608.6,517.4 3609.71,519.05 3610.1,521 3609.71,522.95 3608.6,524.6 3606.95,525.71 3605,526.1 2035.11,526.1 1825.1,736.11 1825.1,1427.05 6527.37,1427.05
+3V3 on Supply (split plane): 6527.37,1407.77 6527.76,1403.85 6528.9,1400.08 6530.76,1396.61 6533.26,1393.56 6536.3,1391.06 6539.78,1389.21 6543.55,1388.06 6547.47,1387.68 6826.58,1387.68 6826.58,1242.42 6826.97,1238.5 6828.11,1234.73 6829.97,1231.25 6832.47,1228.21 6835.51,1225.71 6838.99,1223.85 6842.76,1222.71 6846.68,1222.32 7062.8,1222.32 7062.8,-1383.58 6537.57,-1383.58 6537.23,-1380.07 6536.08,-1376.3 6534.23,-1372.82 6531.73,-1369.78 6528.68,-1367.28 6525.21,-1365.42 6521.44,-1364.28 6517.52,-1363.89 6193.14,-1363.89 6189.21,-1364.28 6185.44,-1365.42 6181.97,-1367.28 6178.92,-1369.78 6176.43,-1372.82 6174.57,-1376.3 6173.42,-1380.07 6173.04,-1383.99 6173.04,-1426.89 4105.1,-1426.89 4105.1,-71 4104.71,-69.05 4103.6,-67.4 4101.95,-66.29 4101.39,-66.18 3517.6,517.6 3515.95,518.71 3514,519.1 3018.1,519.1 3018.1,1427.05 6527.37,1427.05
+12V on Supply (split plane): 3007.9,519.1 2363,519.1 2361.05,518.71 2359.4,517.6 2358.29,515.95 2357.9,514 2358.05,513.26 2299.89,455.1 1942,455.1 1940.05,454.71 1938.4,453.6 1763.4,278.6 1762.29,276.95 1761.9,275 1761.9,-259 1762.29,-260.95 1763.4,-262.6 2091.9,-591.11 2091.9,-783.89 1946.89,-928.9 418,-928.9 416.05,-929.29 414.4,-930.4 242.4,-1102.4 241.29,-1104.05 240.9,-1106 240.9,-1259 241.01,-1259.56 -7.66,-1259.56 -7.66,1259.72 460.08,1259.72 460,1258.9 460.23,1258.81 460.21,1258.31 460.73,1258.09 461.34,1258.34 461.98,1258.08 461.98,1258.61 465.14,1259.92 468.45,1260.1 475.1,1261.23 481.58,1263.1 487.81,1265.68 493.71,1268.94 499.22,1272.85 504.25,1277.34 508.74,1282.37 512.64,1287.87 515.91,1293.77 518.49,1300 520.35,1306.49 521.48,1313.14 521.86,1319.82 521.86,1319.87 521.86,1319.9 521.86,1319.93 521.86,1427.05 3007.9,1427.05
+3V3_MP on Supply (split plane): 4094.9,-74.11 4094.9,-1426.89 523.66,-1426.89 522.39,-1426.36 521.86,-1425.09 521.86,-1318.82 521.86,-1318.73 521.49,-1312.18 520.37,-1305.63 518.54,-1299.25 515.99,-1293.11 512.78,-1287.29 508.93,-1281.87 504.51,-1276.92 499.55,-1272.49 494.13,-1268.65 488.32,-1265.43 482.18,-1262.89 475.79,-1261.05 469.24,-1259.94 462.69,-1259.57 462.61,-1259.56 250.99,-1259.56 251.1,-1259 251.1,-1108.11 420.11,-939.1 1949,-939.1 1950.95,-938.71 1952.6,-937.6 2100.6,-789.6 2101.71,-787.95 2102.1,-786 2102.1,-589 2101.71,-587.05 2100.6,-585.4 1772.1,-256.89 1772.1,272.89 1944.11,444.9 2302,444.9 2303.95,445.29 2305.6,446.4 2367.6,508.4 2367.94,508.9 3010.13,508.9 3011.05,508.29 3013,507.9 3014.95,508.29 3015.87,508.9 3511.89,508.9

## Other copper
Top Layer:
  region: 5751.98,-1379.84 5751.98,-1446.77 6192.92,-1446.77 6192.92,-1383.78 6517.73,-1383.78 6517.73,-1403.46 7082.69,-1403.46 7082.69,-1230.23 6015.76,-1230.23 6015.76,-1379.84
  region: 5743.13,-1374 5743.13,-1440.93 6184.08,-1440.93 6184.08,-1377.94 6508.88,-1377.94 6508.88,-1397.62 7073.84,-1397.62 7073.84,-1224.39 6006.91,-1224.39 6006.91,-1374
Bottom Layer:
  region: 5751.98,-1379.84 5751.98,-1446.77 6192.92,-1446.77 6192.92,-1383.78 6517.73,-1383.78 6517.73,-1403.46 7082.69,-1403.46 7082.69,-1230.23 6015.76,-1230.23 6015.76,-1379.84
  region: 5743.13,-1374 5743.13,-1440.93 6184.08,-1440.93 6184.08,-1377.94 6508.88,-1377.94 6508.88,-1397.62 7073.84,-1397.62 7073.84,-1224.39 6006.91,-1224.39 6006.91,-1374
GND (plane layer: these items are gaps in the copper):
  lines w10: 1820,1452 1820,734 2033,521 3605,521
Supply (plane layer: these items are gaps in the copper):
  lines w10: 246,-1259 246,-1106 418,-934 1949,-934 2097,-786 2097,-589 1767,-259 1767,275 1942,450 2302,450 2364,512 ; 2363,514 3511,514 ; 3013,513 3013,1442 ; 3504,514 3514,514 4100,-72 ; 4100,-1451 4100,-71

## Silkscreen, mask and mechanical layers (free items; w line width, h text height)
Top Overlay:
  drawing of 476 lines, arcs and shapes, not listed
  text "WhiteRabbit" at 3868.46,219.07 h170
  text "Switch SFP AMC" at 3868.46,109.34 h170
  text "T. W. 2009" at 3955.71,-1.72 h150
Mechanical 1:
  lines w0.39: 337.45,-1279.45 462.61,-1279.45 cw(c462.61,-1318.82) 501.98,-1318.82 501.98,-1429.05 ; 348.44,1279.61 461.98,1279.61 ; 460.73,1279.62 ccw(c461.71,1319.87) 501.98,1319.94 501.98,1427.25 cw(c521.66,1427.25) 521.66,1446.93 6547.25,1446.93 6547.25,1411.5 6547.25,1407.56 6846.47,1407.56 6846.47,1242.21 7082.69,1242.21 7082.69,-1403.46 6517.73,-1403.46 6517.73,-1383.78 6192.92,-1383.78 6192.92,-1446.77 519.7,-1446.77 ; 501.98,-1427.09 ccw(c521.66,-1427.09) 521.66,-1446.77 ; 6488.2,-1240.08 6488.2,-1232.2 6488.2,-1228.27 6015.76,-1228.27 6015.76,-1295.2 6488.2,-1295.2 6488.2,-1238.11
Mechanical 15:
  circle w0.39: c238.2,1240.24 r8.35
  lines w0.39: 222.45,1240.24 255.92,1240.24 ; 238.2,1224.49 238.2,1255.99 ; 5751.98,-1153.46 5751.98,-1379.84 6015.76,-1379.84 6015.76,-1153.46 ; 5752.96,-1153.46 6014.77,-1153.46 6015.76,-1163.31 ; 5869.09,-1264.96 cw(c5857.19,-1264.79) 5869.09,-1264.79 ; 5939.91,-1264.75 cw(c5924.19,-1264.75) 5939.91,-1264.53 ; 6214.58,1342.6 6547.25,1342.6 ; 6460.64,1271.73 6460.64,1403.62 6511.82,1403.62 6511.82,1342.6 ; 6486.23,1356.38 6486.23,1403.62 ; 6578.75,1271.73 6578.75,1403.62 6629.93,1403.62 6629.93,1342.6 ; 6604.34,1356.38 6604.34,1403.62 ; 6643.71,1342.6 6846.47,1342.6 ; 6820.88,1356.38 6820.88,1403.62 ; 6846.47,1342.6 6846.47,1271.73 6795.29,1271.73 6795.29,1403.62 6846.47,1403.62 6846.47,1342.6 ; 6368.12,1250.08 6846.47,1250.08 6846.47,1407.56 6547.25,1407.56 6547.25,1435.12 6368.12,1435.12 6368.12,1250.08

## Text inside footprints (layer, text, board x,y; h text height)
C13: Top Overlay "+" at 2034.56,-79.61 h59.06 r90; Mechanical 14 "+" at 2034.56,-79.61 h59.06 r90
C14: Top Overlay "+" at 2090.44,888.61 h59.06 r270; Mechanical 14 "+" at 2090.44,888.61 h59.06 r270
C15: Top Overlay "+" at 3539.44,938.61 h59.06 r270; Mechanical 14 "+" at 3539.44,938.61 h59.06 r270